# Altium PCB CANTRICK.PcbDoc (part 1 of 2)
Units mm, origin at the board's own origin, x right, y up, seen from the top; angles counter-clockwise.
Board outline 87.25 x 92.48 mm, 2 copper layers (Top Layer, Bottom Layer); 104 components, 77 nets, 373 pads, 152 vias.
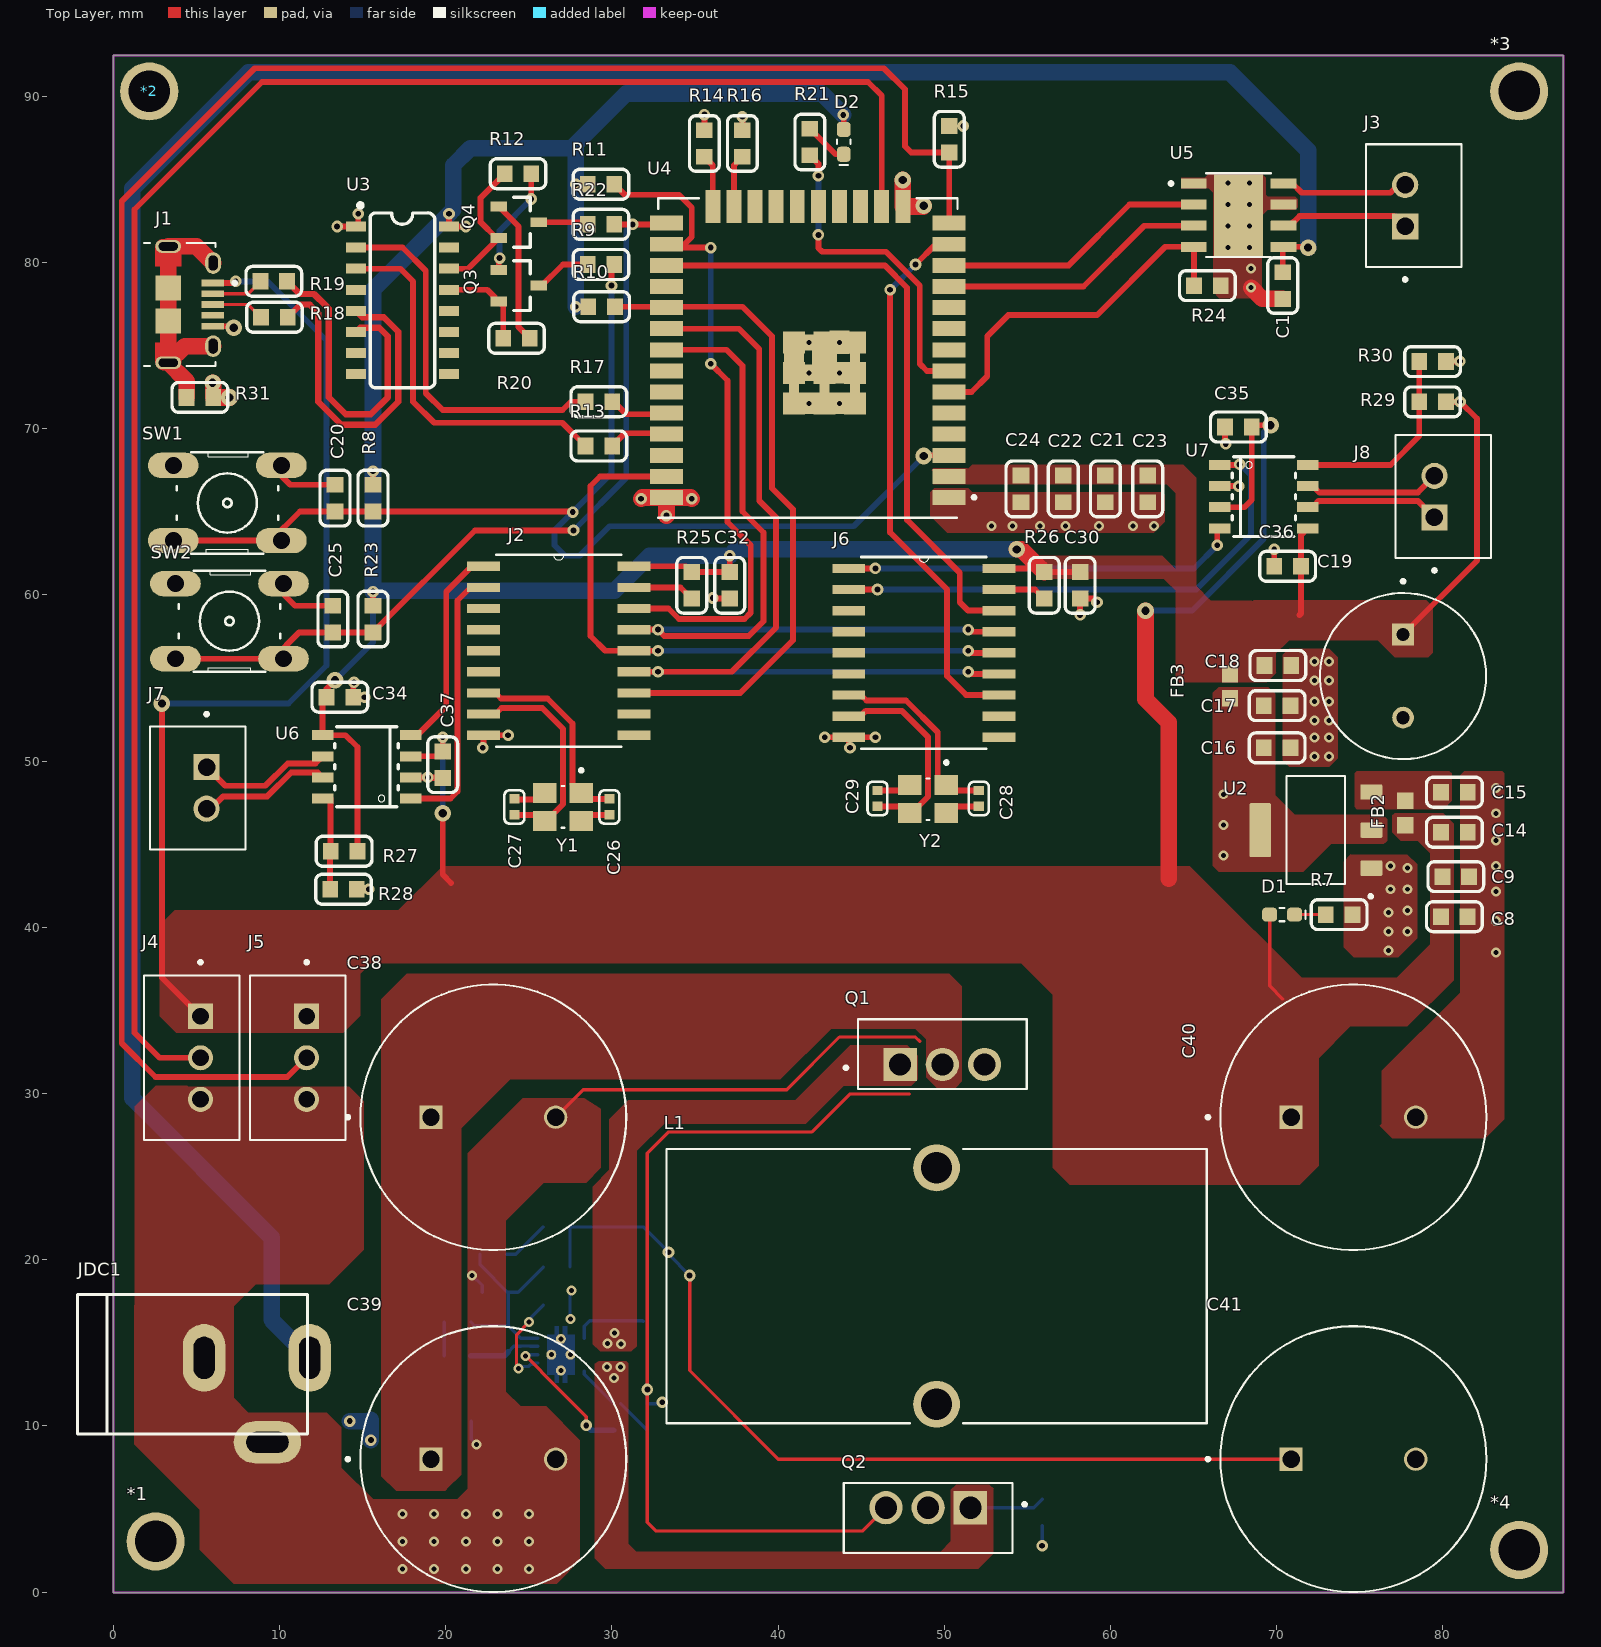
[diagram p0: Top Layer view]
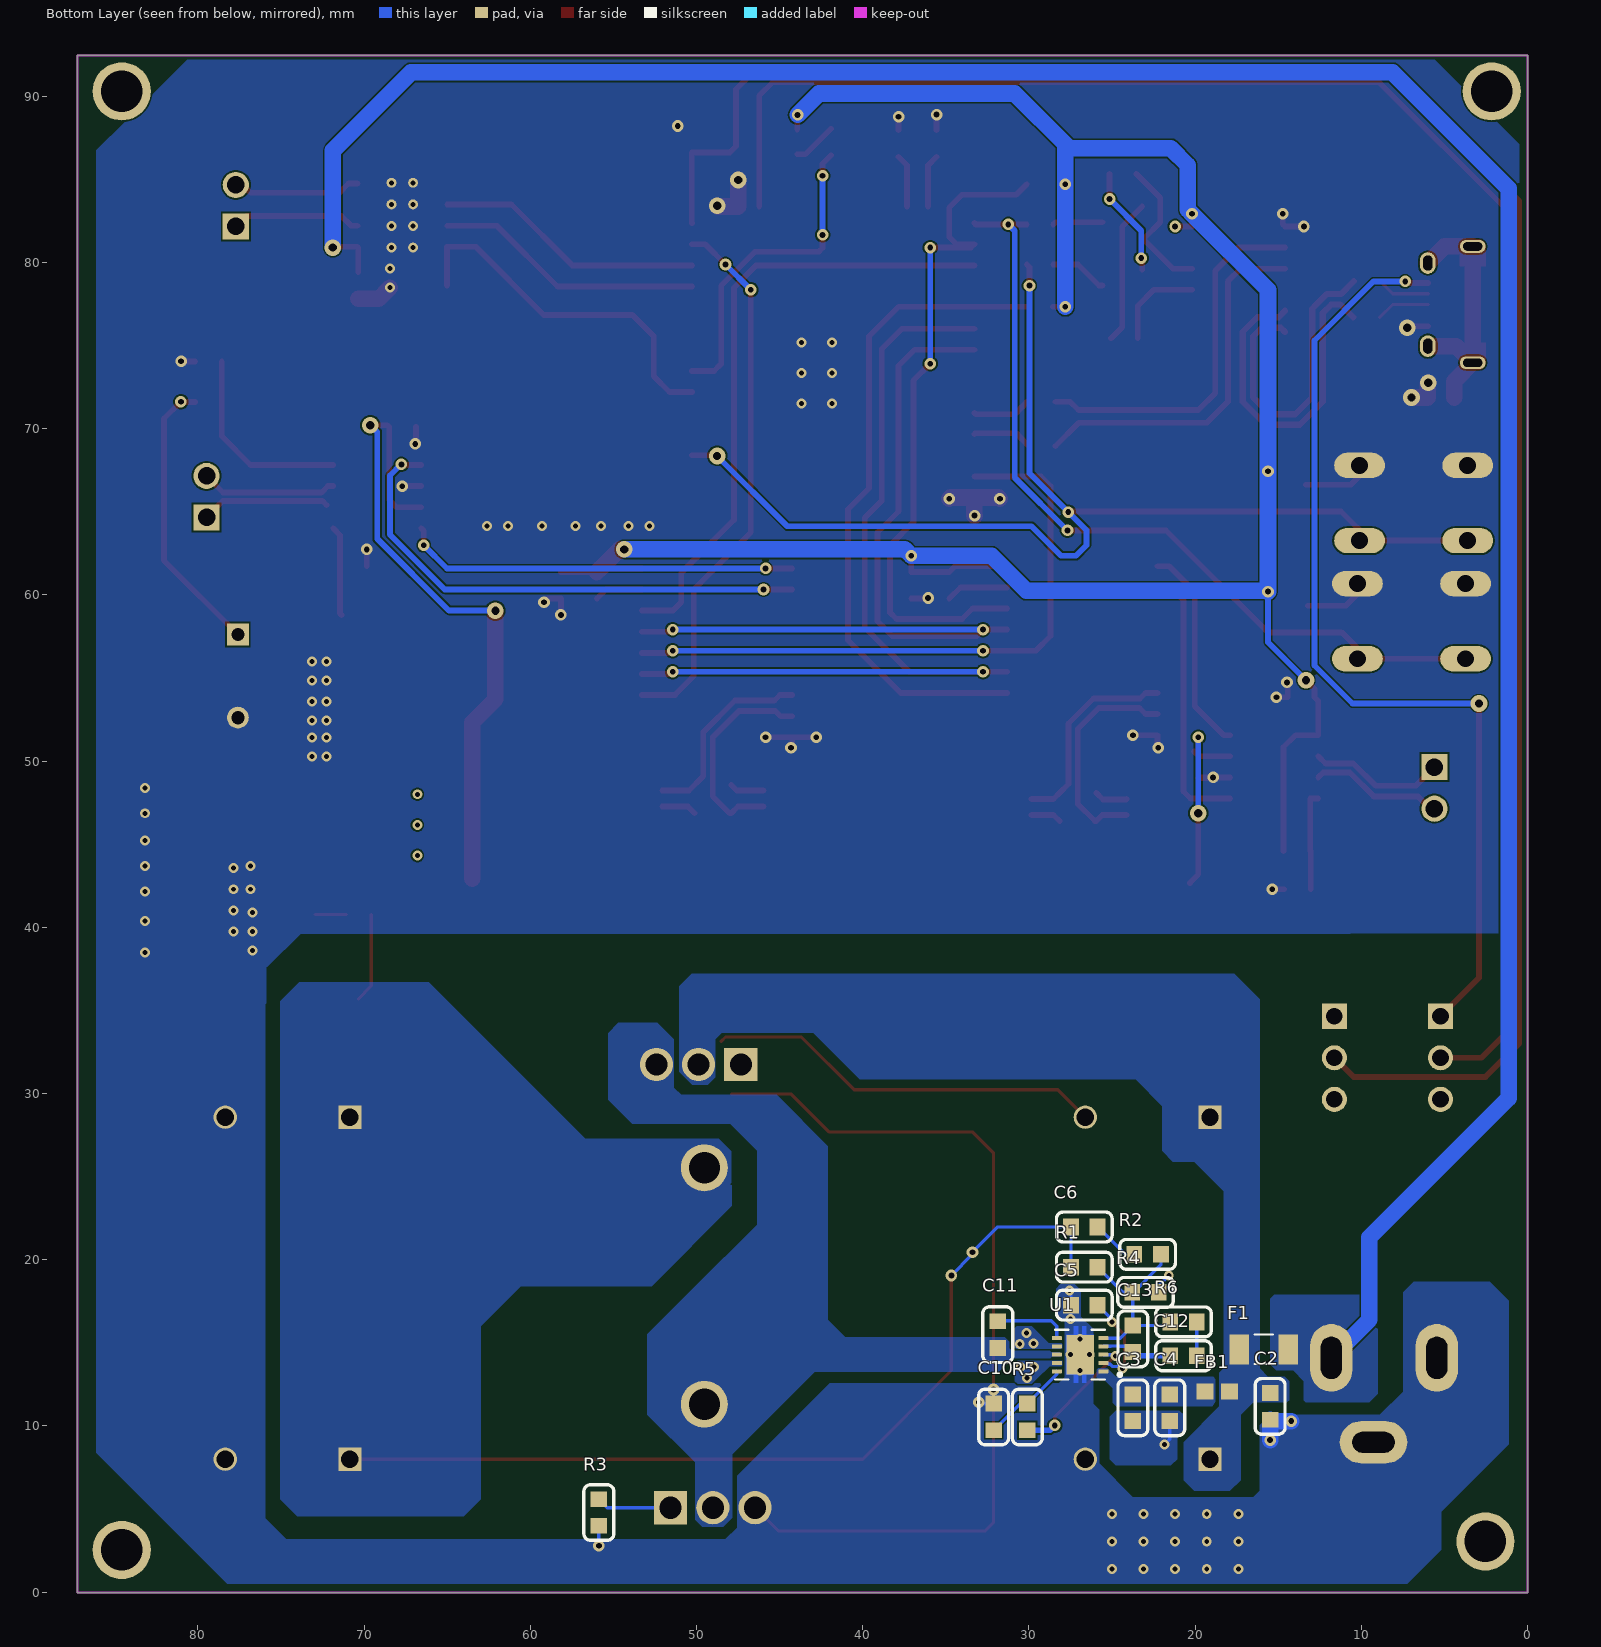
[diagram p1: Bottom Layer view, seen from below]
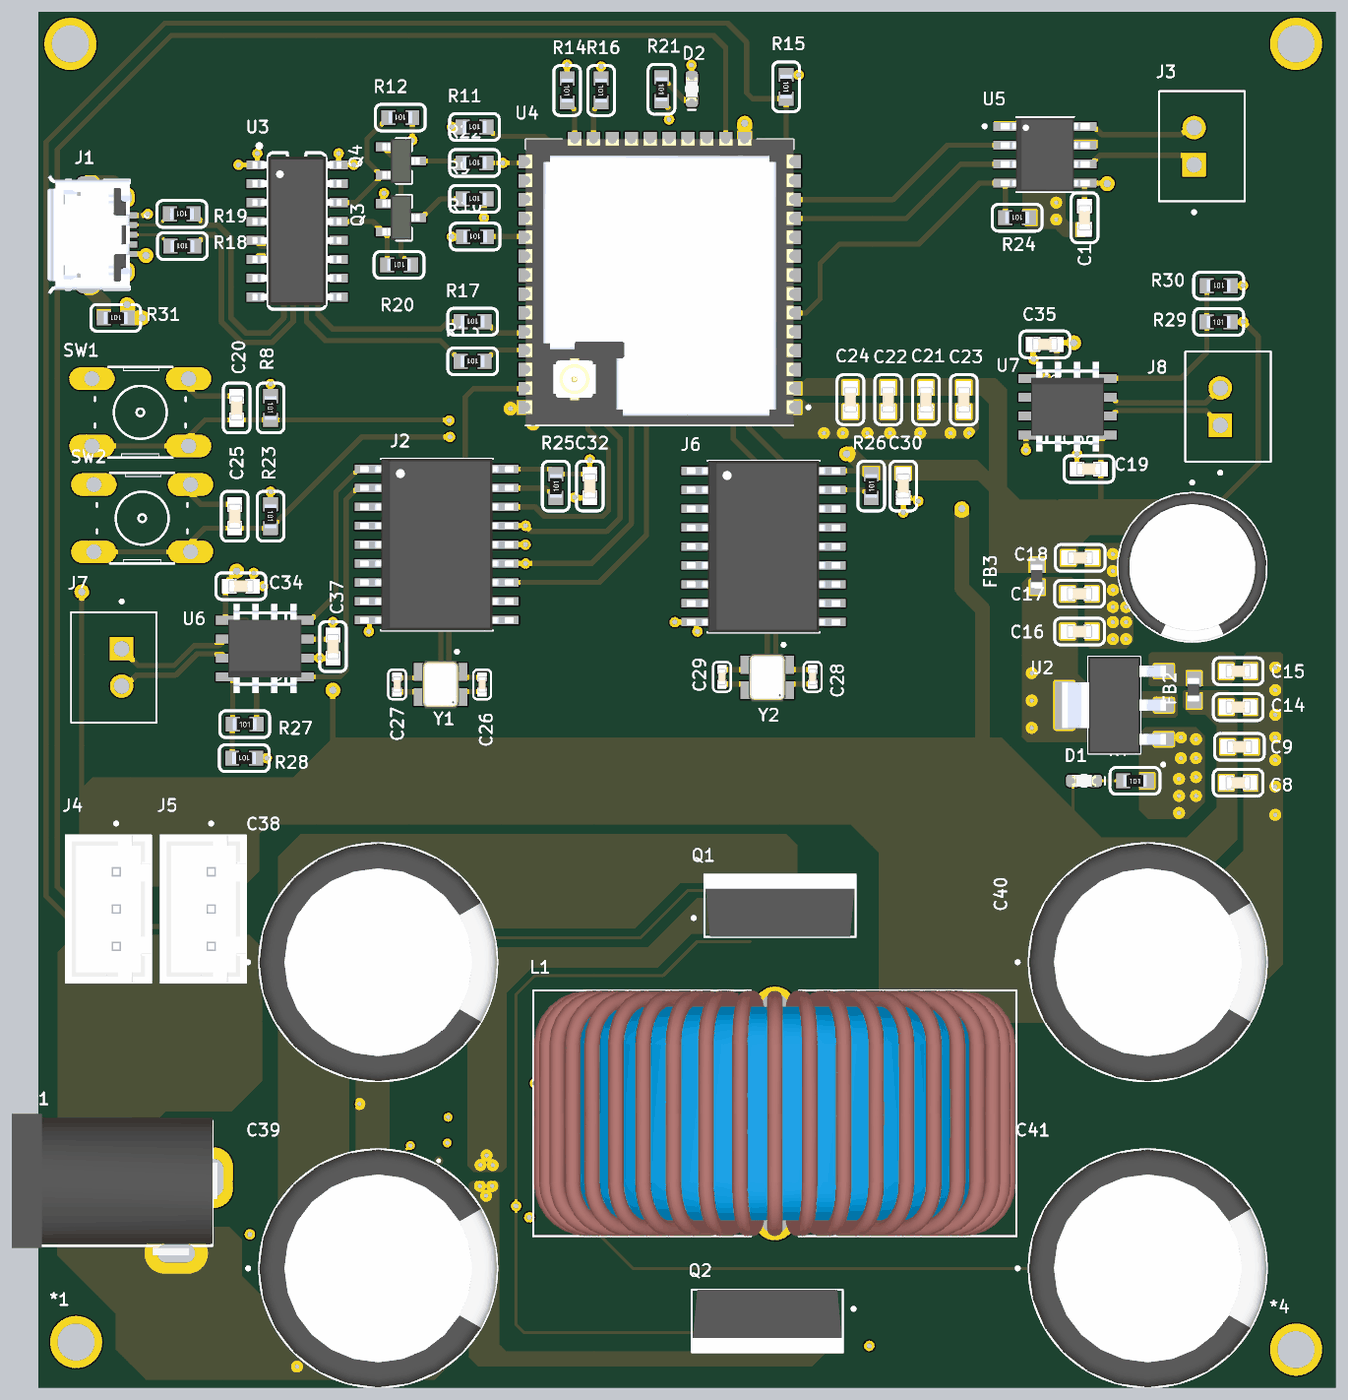
[diagram p2: 3D render of the assembled board from above, using the file's embedded part models]
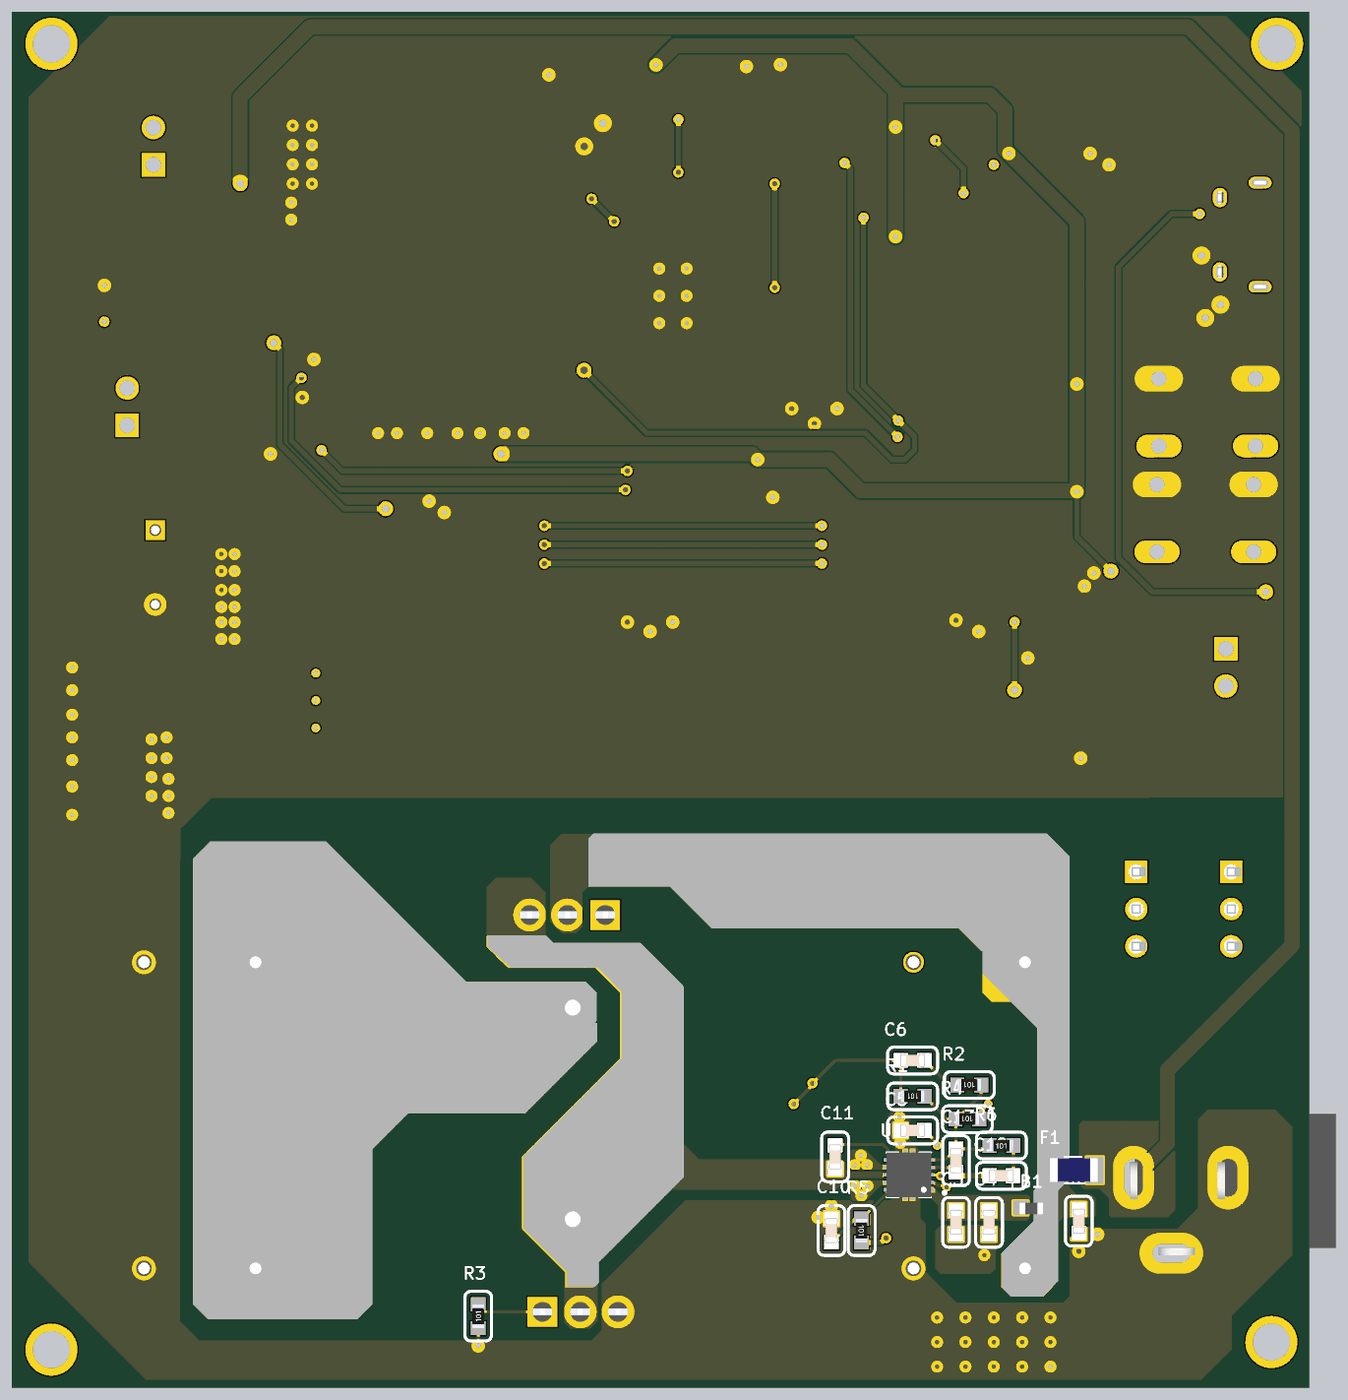
[diagram p3: 3D render of the assembled board from below, using the file's embedded part models]

## Layer stack, top to bottom
Top Solder: solder mask 0.0102, Solder Resist, Dk 3.5
Top Layer: signal copper 0.0356
Dielectric 1: dielectric 0.32, FR-4, Dk 4.8
Bottom Layer: signal copper 0.0356
Bottom Solder: solder mask 0.0102, Solder Resist, Dk 3.5

## Board outline
0,-0.023 0,92.456 87.249,92.456 87.249,-0.023

## Design rules (kind name [scope] priority, off if disabled: settings)
Clearance [All] p1: gap=0.1 ignorepadtopadclearanceinfootprint=FALSE
DiffPairsRouting [All] p1: maxlimit=0.254 minlimit=0.254 mostfreqgap=0.254 toplayer_minwidth=0.381 toplayer_maxwidth=0.381 toplayer_prefwidth=0.381 bottomlayer_minwidth=0.381 bottomlayer_maxwidth=0.381 bottomlayer_prefwidth=0.381 maxuncoupledlength=12.7
PolygonConnect [All] p1: connectstyle=Direct reliefconductorwidth=0.254 reliefentries=4 polygonreliefangle="90 Angle" airgapwidth=0.254
RoutingVias [All] p1: holewidth=0.35 width=0.7 viastyle="Through Hole" minholewidth=0.3 minwidth=0.6 maxholewidth=0.5 maxwidth=1
SolderMaskExpansion [All] p1: expansion=0.102 istentingtop=FALSE
Width [All] p1: maxlimit=1 minlimit=0.2 preferedwidth=0.35
29 further rules are at their usual default settings.

## Classes and differential pairs
component class "U_CANTRICK POWER": C2 C3 C4 C5 C6 C8 C9 C10 C11 C12 C13 C14 C15 C16 C17 C18 C19 C38 C39 C40 C41 D1 F1 FB1 FB2 FB3 JDC1 L1 Q1 Q2 R1 R2 R3 R4 R5 R6 R7 U1 U2
component class "U_CANTRICK PERIPHERAL": *1 *2 *3 *4 C1 C26 C27 C28 C29 C30 C32 C34 C35 C36 C37 J2 J3 J4 J5 J6 J7 J8 R24 R25 R26 R27 R28 R29 R30 U5 U6 U7 Y1 Y2
component class "U_CANTRICK MCU": C20 C21 C22 C23 C24 C25 D2 J1 Q3 Q4 R8 R9 R10 R11 R12 R13 R14 R15 R16 R17 R18 R19 R20 R21 R22 R23 R31 SW1 SW2 U3 U4
differential pair D: +D_P -D_N

## Components (designator, comment, footprint, x,y, rotation, side; value= is the part's Value field where it differs from the comment)
*1 "Hole M3" M3 2.54,3.048 r0 top
*2 "Hole M3" M3 2.159,90.297 r0 top
*3 "Hole M3" M3 84.582,90.297 r0 top
*4 "Hole M3" M3 84.582,2.54 r0 top
C1 "10uF" CAP-CER0603-0.8H 70.358,78.613 r270 top
C2 "10uF" CAP-CER0603-0.8H 15.494,11.176 r90 bottom
C3 "10uF" CAP-CER0603-0.8H 23.749,11.093 r90 bottom
C4 "10uF" CAP-CER0603-0.8H 21.531,11.093 r90 bottom
C5 "3.3nF" CAP-CER0603-0.8H 26.67,17.272 r180 bottom
C6 "820pF" CAP-CER0603-0.8H 26.67,21.971 r0 bottom
C8 "10uF" CAP-CER0603-0.8H 80.683,40.64 r180 top
C9 "10uF" CAP-CER0603-0.8H 80.772,43.053 r180 top
C10 "2.2uF" CAP-CER0603-0.8H 32.131,10.541 r270 bottom
C11 "100nF" CAP-CER0603-0.8H 31.877,15.494 r90 bottom
C12 "2.7nF" CAP-CER0603-0.8H 20.701,14.224 r0 bottom
C13 "100pF" CAP-CER0603-0.8H 23.749,15.24 r270 bottom
C14 "10 µF" "CAP 0603" 80.772,45.72 r180 top
C15 "10 µF" "CAP 0603" 80.772,48.133 r180 top
C16 "100nF" "CAP 0603" 70.104,50.8 r180 top
C17 "10 µF" "CAP 0603" 70.104,53.34 r180 top
C18 "10 µF" "CAP 0603" 70.151,55.753 r180 top
C19 "ECA1CHG331" 330UF-5mm 77.597,55.118 r270 top
C20 "100nF" "CAP 0603" 13.335,65.909 r270 top
C21 "100nF" "CAP 0603" 59.69,66.294 r90 top
C22 "10 µF" "CAP 0603" 57.15,66.294 r90 top
C23 "10 µF" "CAP 0603" 62.23,66.294 r90 top
C24 "100nF" "CAP 0603" 54.61,66.294 r90 top
C25 "100nF" "CAP 0603" 13.208,58.632 r270 top
C26 "8pF" CAP-CER0402-0.5H 29.845,47.244 r270 top
C27 "8pF" CAP-CER0402-0.5H 24.13,47.244 r90 top
C28 "8pF" CAP-CER0402-0.5H 52.07,47.752 r270 top
C29 "8pF" CAP-CER0402-0.5H 45.974,47.752 r90 top
C30 "10uF" CAP-CER0603-0.8H 58.166,60.579 r90 top
C32 "10uF" CAP-CER0603-0.8H 37.084,60.579 r90 top
C34 "10uF" CAP-CER0603-0.8H 13.627,53.848 r180 top
C35 "10uF" CAP-CER0603-0.8H 67.691,70.104 r0 top
C36 "10uF" CAP-CER0603-0.8H 70.65,61.722 r0 top
C37 "10uF" CAP-CER0603-0.8H 19.812,49.784 r90 top
C38 "EEUFC1V222" CAPPRD750W80D1600H3150 22.86,28.575 r0 top
C39 "EEUFC1V222" CAPPRD750W80D1600H3150 22.86,8.001 r0 top
C40 "EEUFC1V222" CAPPRD750W80D1600H3150 74.609,28.575 r0 top
C41 "EEUFC1V222" CAPPRD750W80D1600H3150 74.609,8.001 r0 top
D1 "Orange" LED 70.193,40.767 r180 top
D2 "Orange" LED 43.942,87.388 r90 top
F1 "C1F5" "FUSE C1F5" 15.875,14.605 r0 bottom
FB1 "100MHz 2A 50mOhm" "FB 0603" 18.669,12.065 r0 bottom
FB2 "330 Ohms @ 100 MHz" FB_0603 77.724,46.863 r90 top
FB3 "330 Ohms @ 100 MHz" FB_0603 67.181,54.498 r90 top
J1 "MICRO B" "MICRO USB B" 3.302,77.597 r270 top
J2 "MCP2515T-E/SO" SOIC127P1030X265-18N 26.797,56.642 r0 top
J3 "B2B-XH-A" JST_B2B-XH-A 78.249,83.419 r270 top
J4 "B3B-XH-A" JST_B3B-XH-A 4.717,32.15 r90 top
J5 "B3B-XH-A" JST_B3B-XH-A 11.102,32.15 r90 top
J6 "MCP2515T-E/SO" SOIC127P1030X265-18N 48.768,56.515 r0 top
J7 "B2B-XH-A" JST_B2B-XH-A 5.08,48.387 r90 top
J8 "B2B-XH-A" JST_B2B-XH-A 80.01,65.913 r270 top
JDC1 "Jac DC" DC0 8.636,11.557 r0 top
L1 "HCTI-10-20.0" IND_HCTI-10-20.0 49.53,18.415 r90 top
Q1 "IRLB8721PBF" TO254P1067X483X2057-3 49.879,31.75 r0 top
Q2 "IRLB8721PBF" TO254P1067X483X2057-3 49.022,5.08 r180 top
Q3 "NMOS" SOT23-3 24.384,78.613 r0 top
Q4 "NMOS" SOT23-3 24.384,82.423 r0 top
R1 "10K" RES-CHP0603-0.45H-101 26.67,19.558 r0 bottom
R2 "360R" RES-CHP0603-0.45H-101 22.86,20.32 r0 bottom
R3 "10K" RES-CHP0603-0.45H-101 55.88,4.788 r90 bottom
R4 "1.37K" RES-CHP0603-0.45H-101 22.987,18.034 r0 bottom
R5 "100K" RES-CHP0603-0.45H-101 30.099,10.541 r270 bottom
R6 "3.16k" RES-CHP0603-0.45H-101 20.701,16.256 r180 bottom
R7 "1K" "Res 0603" 73.749,40.767 r0 top
R8 "10K" "Res 0603" 15.621,65.824 r270 top
R9 "0R" "Res 0603" 29.337,79.883 r180 top
R10 "10K" "Res 0603" 29.375,77.343 r180 top
R11 "10K" "Res 0603" 29.337,84.709 r180 top
R12 "10K" "Res 0603" 24.346,85.344 r180 top
R13 "22R" "Res 0603" 29.21,68.961 r180 top
R14 "10K" "Res 0603" 35.56,87.16 r270 top
R15 "10K" "Res 0603" 50.292,87.414 r270 top
R16 "10K" "Res 0603" 37.846,87.16 r270 top
R17 "22R" "Res 0603" 29.21,71.628 r180 top
R18 "22R" "Res 0603" 9.69,76.708 r180 top
R19 "22R" "Res 0603" 9.652,78.867 r180 top
R20 "10K" "Res 0603" 24.257,75.438 r180 top
R21 "1K" "Res 0603" 41.91,87.249 r270 top
R22 "0R" "Res 0603" 29.337,82.296 r180 top
R23 "10K" "Res 0603" 15.621,58.547 r270 top
R24 "10K" "Res 0603" 65.824,78.613 r180 top
R25 "10K" "Res 0603" 34.798,60.579 r90 top
R26 "10K" "Res 0603" 56.007,60.579 r90 top
R27 "10K" "Res 0603" 13.881,44.577 r0 top
R28 "10K" "Res 0603" 13.843,42.291 r180 top
R29 "10K" "Res 0603" 79.372,71.615 r0 top
R30 "10K" "Res 0603" 79.375,74.041 r180 top
R31 "22R" "Res 0603" 5.207,71.882 r180 top
SW1 "SW2" SWITCH 6.858,65.532 r180 top
SW2 "SW2" SWITCH 6.985,58.42 r180 top
U1 "TPS40305DRCT" VREG_V62/16624-01YE 26.924,14.285 r0 bottom
U2 "AMS1117" AMS1117 72.347,45.851 r90 top
U3 "CH340C" CH340C 17.272,77.851 r270 top
U4 "ESP32-WROOM-32UE-N8" ? 42.291,70.866 r180 top
U5 "DRV8871DDAR" VREG_LM5017MR/NOPB 67.706,82.849 r0 top
U6 "TJA1050" SOT96-1 15.24,49.657 r90 top
U7 "TJA1050" SOT96-1 69.215,65.913 r270 top
Y1 "C3E-8Mhz" XTAL_C3E-8.000-8-1015-R 27.051,47.244 r270 top
Y2 "C3E-8Mhz" XTAL_C3E-8.000-8-1015-R 49.019,47.715 r270 top

## Footprints (in the part's own frame and the unit in brackets; to place one, negate y for a bottom-side part, rotate by r counter-clockwise, add the part's x,y. Pads: shape width x height; smd on the part's side, far side on the other; paste and mask are expansions set on the pad)
330UF-5mm [mm]
  rect 1.308x1.308 / inner round 1.308 / far side rect 1.308x1.308 hole 0.8: 1(-2.5,0)
  round 1.308 hole 0.8: 2(2.5,0)
  silkscreen extent -5.8,-5 5,5, body extent -5,-5 5,5, height 20
AMS1117 [mm]
  rrect15% 0.93x1.31 smd: 1(-2.29,-3.345) 2(0,-3.345) 3(2.29,-3.345)
  rrect15% 3.24x1.31 smd: 4(0,3.345)
  silkscreen extent -4.09,-3.4 3.25,1.75, body extent -3.25,-3.5 3.25,3.5, height 1.8
"CAP 0603" [mm]
  rect 0.95x1 smd: 1(-0.715,0) 2(0.885,0)
  silkscreen extent -1.59,-0.9 1.76,0.9, body extent -1.19,-0.5 1.36,0.5, height 0.82
CAP-CER0402-0.5H [mm]
  rect 0.57x0.62 smd: 1(-0.48,0) 2(0.48,0)
  silkscreen extent -1,-0.6 1,0.6, body extent -0.8,-0.33 0.8,0.32, height 0.54
CAP-CER0603-0.8H [mm]
  rect 0.95x1 smd: 1(-0.8,0) 2(0.8,0)
  silkscreen extent -1.68,-0.9 1.68,0.9, body extent -1.28,-0.5 1.28,0.5, height 0.84
CAPPRD750W80D1600H3150 [mm]
  round 1.4 hole 1.05: N(3.75,0)
  rect 1.4x1.4 hole 1.05: P(-3.75,0)
  silkscreen extent -8.85,-8 8,8, body extent -8,-8 8,8, height 31.5
CH340C [mm]
  rect 0.6x1.2 smd: 1(-4.318,-2.673) 2(-3.048,-2.673) 3(-1.778,-2.673) 4(-0.508,-2.673) 5(0.762,-2.673) 6(2.032,-2.673) 7(3.302,-2.673) 8(4.572,-2.673) 9(4.572,2.927) 10(3.302,2.927) 11(2.032,2.927) 12(0.762,2.927) 13(-0.508,2.927) 14(-1.778,2.927) 15(-3.048,2.927) 16(-4.318,2.927)
  silkscreen extent -5.71,-2.54 5.39,2.07, body extent -4.87,-2.87 5.13,3.13, height 1.8
DC0 [mil]
  oval 100x160 hole 50 slot 100 at 90 deg: 1(125,100) 2(-125,100)
  oval 160x100 hole 50 slot 100 at 0 deg: 3(25,-100)
  silkscreen extent -425,-80 120,250, body extent -410,-105 134,269, height 434
"FB 0603" [mm]
  rect 1x0.97 smd: 1(-0.733,-0.006) 2(0.737,-0.006)
  body extent -0.79,-0.36 0.81,0.44, height 0.75
FB_0603 [mm]
  rect 1x0.97 smd: 1(-0.723,-0.002) 2(0.747,-0.002)
  body extent -0.78,-0.36 0.82,0.44, height 0.75
"FUSE C1F5" [mm]
  rect 1.17x1.8 smd: 1(-1.47,0) 2(1.47,0)
  silkscreen extent -0.56,-0.89 0.56,0.89, body extent -1.65,-0.8 1.55,0.78, height 0.8
IND_HCTI-10-20.0 [mm]
  round 2.82 hole 1.88: 1(-7.112,0) 2(7.112,0)
  silkscreen extent -8.26,-16.26 8.26,16.26, body extent -8.26,-16.21 8.26,16.21, height 34.1
JST_B2B-XH-A [mm]
  rect 1.575x1.575 / inner round 1.575 / far side rect 1.575x1.575 hole 1.05: 1(1.25,-0.525)
  round 1.575 hole 1.05: 2(-1.25,-0.525)
  silkscreen extent -3.7,-2.88 4.54,2.88
JST_B3B-XH-A [mm]
  rect 1.508x1.508 / inner round 1.508 / far side rect 1.508x1.508 hole 1: 1(2.5,-0.525)
  round 1.508 hole 1: 2(0,-0.525) 3(-2.5,-0.525)
  silkscreen extent -4.95,-2.88 5.85,2.88, body extent -4.95,-2.88 4.95,2.88, height 7
LED [mm]
  rrect53% 0.91x0.83 smd: 1(0.623,0) 2(-0.877,0)
  silkscreen extent -1.52,-0.4 0.01,0.4, body extent -0.93,-0.4 0.67,0.4, height 0.7
M3 [mm]
  round 3.5 hole 2.5: 1(0,0)
"MICRO USB B" [mm]
  rect 0.4x1.35 smd: 1(-1.173,2.675) 2(-0.523,2.675) 3(0.127,2.675) 4(0.777,2.675) 5(1.427,2.675)
  oval 0.775x1.55 hole 0.5 slot 1.15 at 90 deg mask+0: SH1(-3.373,0) SH4(3.627,0)
  rect 1.5x1.55 smd: SH2(1.127,0) SH3(-0.873,0)
  oval 1.3x0.95 hole 0.55 slot 0.9 at 0 deg: SH5(-2.373,2.7) SH6(2.627,2.7)
  Top Layer region: -2.173,-0.775 -3.318,-0.775 -3.344,-0.774 -3.37,-0.772 -3.396,-0.769 -3.422,-0.764 -3.447,-0.758 -3.473,-0.751 -3.497,-0.742 -3.521,-0.732 -3.545,-0.721 -3.568,-0.708 -3.59,-0.694 -3.612,-0.68 -3.633,-0.664 -3.653,-0.647 -3.672,-0.629 -3.69,-0.61 -3.707,-0.59 -3.723,-0.569 -3.737,-0.547 -3.751,-0.525 -3.764,-0.502 -3.775,-0.478 -3.785,-0.454 -3.794,-0.43 -3.801,-0.404 -3.807,-0.379 -3.812,-0.353 -3.815,-0.327 -3.817,-0.301 -3.818,-0.275 -3.818,0.275 -3.817,0.301 -3.815,0.327 -3.812,0.353 -3.807,0.379 -3.801,0.404 -3.794,0.43 -3.785,0.454 -3.775,0.478 -3.764,0.502 -3.751,0.525 -3.737,0.547 -3.723,0.569 -3.707,0.59 -3.69,0.61 -3.672,0.629 -3.653,0.647 -3.633,0.664 -3.612,0.68 -3.59,0.694 -3.568,0.708 -3.545,0.721 -3.521,0.732 -3.497,0.742 -3.473,0.751 -3.447,0.758 -3.422,0.764 -3.396,0.769 -3.37,0.772 -3.344,0.774 -3.318,0.775 -2.173,0.775
  Top Layer region: 3.598,0.774 3.624,0.772 3.65,0.769 3.676,0.764 3.701,0.758 3.727,0.751 3.751,0.742 3.775,0.732 3.799,0.721 3.822,0.708 3.844,0.694 3.866,0.68 3.887,0.664 3.907,0.647 3.926,0.629 3.944,0.61 3.961,0.59 3.977,0.569 3.991,0.547 4.005,0.525 4.018,0.502 4.029,0.478 4.039,0.454 4.048,0.43 4.055,0.404 4.061,0.379 4.066,0.353 4.069,0.327 4.071,0.301 4.072,0.275 4.072,-0.275 4.071,-0.301 4.069,-0.327 4.066,-0.353 4.061,-0.379 4.055,-0.404 4.048,-0.43 4.039,-0.454 4.029,-0.478 4.018,-0.502 4.005,-0.525 3.991,-0.547 3.977,-0.569 3.961,-0.59 3.944,-0.61 3.926,-0.629 3.907,-0.647 3.887,-0.664 3.866,-0.68 3.844,-0.694 3.822,-0.708 3.799,-0.721 3.775,-0.732 3.751,-0.742 3.727,-0.751 3.701,-0.758 3.676,-0.764 3.65,-0.769 3.624,-0.772 3.598,-0.774 3.572,-0.775 2.427,-0.775 2.427,0.775 3.572,0.775
  silkscreen extent -3.57,-1.45 3.83,4.1, body extent -3.9,-2.68 4.15,2.85, height 2.67
"Res 0603" [mm]
  rect 0.95x1 smd: 1(-0.8,0) 2(0.8,0)
  silkscreen extent -1.68,-0.9 1.68,0.9, body extent -0.8,-0.4 0.8,0.4, height 0.48
RES-CHP0603-0.45H-101 [mm]
  rect 0.95x1 smd: 1(-0.8,0) 2(0.8,0)
  silkscreen extent -1.68,-0.9 1.68,0.9, body extent -0.8,-0.4 0.8,0.4, height 0.48
SOIC127P1030X265-18N [mil]
  rect 78x22 smd: 1(-178,200) 2(-178,150) 3(-178,100) 4(-178,50) 5(-178,0) 6(-178,-50) 7(-178,-100) 8(-178,-150) 9(-178,-200) 10(178,-200) 11(178,-150) 12(178,-100) 13(178,-50) 14(178,0) 15(178,50) 16(178,100) 17(178,150) 18(178,200)
  silkscreen extent -148,-227 148,227, body extent -203,-227 203,227, height 104
SOT23-3 [mm]
  rect 1x0.6 smd: 1(-1.2,0.95) 2(-1.2,-0.95) 3(1.2,0)
  silkscreen extent -0.3,-1.5 0.7,1.5, body extent -1.24,-1.49 1.26,1.51, height 1.1
SOT96-1 [mm]
  rect 0.6x1.3 smd: 1(-1.905,-2.65) 2(-0.635,-2.65) 3(0.635,-2.65) 4(1.905,-2.65) 5(1.905,2.65) 6(0.635,2.65) 7(-0.635,2.65) 8(-1.905,2.65)
  silkscreen extent -2.4,-1.9 2.4,1.91, body extent -3,-2.45 3,2.45, height 1.75
SWITCH [mil]
  oval 120x60 hole 40: 1(-128,89) 2(128,89) 3(-128,-89) 4(128,-89)
  silkscreen extent -120,-120 120,120, body extent -161,-122 151,122, height 374
TO254P1067X483X2057-3 [mm]
  rect 2x2 / inner round 2 / far side rect 2x2 hole 1.33: 1(-2.54,0)
  round 2 hole 1.33: 2(0,0) 3(2.54,0)
  silkscreen extent -5.9,-1.48 5.08,2.72, body extent -5.08,-1.47 5.08,2.72, height 20.57
VREG_LM5017MR/NOPB [mm]
  rrect5% 1.55x0.6 smd mask+0: 1(-2.7,1.905) 2(-2.7,0.635) 3(-2.7,-0.635) 4(-2.7,-1.905) 5(2.7,-1.905) 6(2.7,-0.635) 7(2.7,0.635) 8(2.7,1.905)
  rect 2.95x4.9 smd paste-3 mask+0: 9(0,0)
  round 0.6 hole 0.3: 10(-0.65,1.95) 11(0.65,1.95) 12(-0.65,0.65) 13(0.65,0.65) 14(-0.65,-0.65) 15(0.65,-0.65) 16(-0.65,-1.95) 17(0.65,-1.95)
  silkscreen extent -4.17,-2.52 1.95,2.52, body extent -3,-2.45 3,2.45, height 1.7
VREG_V62/16624-01YE [mm]
  rrect25% 0.6x0.24 smd paste+0 mask+0: 1(-1.4,1) 2(-1.4,0.5) 3(-1.4,0) 4(-1.4,-0.5) 5(-1.4,-1) 6(1.4,-1) 7(1.4,-0.5) 8(1.4,0) 9(1.4,0.5) 10(1.4,1)
  rrect5% 1.65x2.4 smd paste-2 mask+0: 11(0,0)
  round 0.6 hole 0.3 mask+0: 12(0,-0.95) 13(-0.575,0) 14(0.575,0) 15(0,0.95)
  Top Layer region: 0.375,1.2 0.825,1.2 0.825,-1.2 0.375,-1.2 0.375,-1.7 0.125,-1.7 0.125,-1.2 -0.125,-1.2 -0.125,-1.7 -0.375,-1.7 -0.375,-1.2 -0.825,-1.2 -0.825,1.2 -0.375,1.2 -0.375,1.7 -0.125,1.7 -0.125,1.2 0.125,1.2 0.125,1.7 0.375,1.7
  silkscreen extent -2.49,-1.5 1.5,1.5, body extent -1.5,-1.5 1.5,1.5, height 1
XTAL_C3E-8.000-8-1015-R [mm]
  rect 1.2x1.4 smd: 1(-0.85,1.1) 2(-0.85,-1.1) 3(0.85,-1.1) 4(0.85,1.1)
  silkscreen extent -2.3,-0.08 1.25,1.2, body extent -1.25,-1.6 1.25,1.6, height 0.75
? [mm]
  rect 2x0.9 smd: 1(-7.992,5.006) 2(-7.992,3.736) 3(-7.992,2.466) 4(-7.992,1.196) 5(-7.992,-0.074) 6(-7.992,-1.344) 7(-7.992,-2.614) 8(-7.992,-3.884) 9(-7.992,-5.154) 10(-7.992,-6.424) 11(-7.992,-7.694) 12(-7.992,-8.964) 13(-7.992,-10.234) 14(-7.992,-11.504) 25(9.008,-11.504) 26(9.008,-10.234) 27(9.008,-8.964) 28(9.008,-7.694) 29(9.008,-6.424) 30(9.008,-5.154) 31(9.008,-3.884) 32(9.008,-2.614) 33(9.008,-1.344) 34(9.008,-0.074) 35(9.008,1.196) 36(9.008,2.466) 37(9.008,3.736) 38(9.008,5.006)
  rect 0.9x2 smd: 15(-5.207,-12.504) 16(-3.937,-12.504) 17(-2.667,-12.504) 18(-1.397,-12.504) 19(-0.127,-12.504) 20(1.143,-12.504) 21(2.413,-12.504) 22(3.683,-12.504) 23(4.953,-12.504) 24(6.223,-12.504)
  rect 1.33x1.33 smd: 39_1(-2.327,-0.659) 39_2(-0.492,-0.659) 39_3(1.343,-0.659) 39_4(-2.327,-2.494) 39_5(-0.492,-2.494) 39_6(1.343,-2.494) 39_7(-2.327,-4.329) 39_8(-0.492,-4.329) 39_9(1.343,-4.329)
  rect 0.6x1.3 smd: 39_10(-1.409,-0.659) 39_11(0.426,-0.659) 39_15(-1.409,-2.494)
  rect 0.6x1.2 smd: 39_12(-2.327,-1.576)
  rect 0.6x1 smd: 39_13(-0.492,-1.576) 39_14(1.343,-1.576) 39_16(0.426,-2.494) 39_17(-2.327,-3.411)
  rect 1.5x1.55 smd: 39_18(-0.492,-3.411)
  rect 1.2x1.4 smd: 39_19(1.343,-3.411) 39_20(-1.409,-4.329)
  rect 1x0.97 smd: 39_21(0.426,-4.329)
  silkscreen extent -9.59,-13 9.52,6.22, body extent -8.49,-13.03 9.51,6.17, height 3.35

## Part data
C1 C2 C3 C4 C5 C6 C8 C9 C10 C11 C12 C13 C30 C32 C34 C35 C36 C37: library part "CAPCER0001 100nF 10% 50V X7R 0603 SMD", "CAP CER 100nF 10% 50V X7R 0603 SMD", CERTIFICATION=NA, CLASS=B, ComponentLink1Description=Datasheet, ComponentLink1URL=https://datasheet.lcsc.com/lcsc/1811021431_Samsung-Electro-Mechanics-CL10B104KB8NNNC_C1591.pdf, LINE=SMT, MOUNT=SMD, TMG CODE=None, TMG PN=CAPCER0001, TYPE=EP, UNIT=PCS
C14 C15 C17 C18 C22 C23: library part GMC10X7R106K10NT, "CAP0603 X7R 10UF 10% 10V", Device Package="0603 (1608 Metric)", Manufacturer="Cal-Chip Electronics, Inc.", Operating Temperature="-55°C ~ 125°C", Supplier Part Number 1=4713-GMC10X7R106K10NTCT-ND, Temperature Coefficient=X7R, Tolerance=±10%, Voltage - Rated=10V, Applications="General Purpose", Capacitance="10 µF", ComponentLink1Description=Datasheet, ComponentLink1URL=https://88ce57.p3cdn1.secureserver.net/wp-content/uploads/2023/01/gmc_series-2.pdf, ComponentLink2Description="DigiKey Link", ComponentLink2URL=https://www.digikey.com/en/products/detail/cal-chip-electronics-inc/GMC10X7R106K10NT/18151126, LastUpdated="2/9/2024 8:09:39 PM", Lifecycle Status=Active, Minimum Order=1, Mounting Type="Surface Mount, MLCC", Package / Case="0603 (1608 Metric)", Packaging=TapeAndReel, Part Number=GMC10X7R106K10NT, Part Status=Active, partid=49835, Price=0.26, Series=GMC, Size / Dimension="0.063\" L x 0.031\" W (1.60mm x 0.80mm)", Supplier 1=DigiKey, Thickness (Max)="0.039\" (1.00mm)"
C16 C20 C21 C24 C25: library part GMC10X7R106K10NT, "CAP0603 X7R 10UF 10% 10V", Capacitance="10 µF", Device Package="0603 (1608 Metric)", Manufacturer="Cal-Chip Electronics, Inc.", Operating Temperature="-55°C ~ 125°C", Supplier Part Number 1=4713-GMC10X7R106K10NTCT-ND, Temperature Coefficient=X7R, Tolerance=±10%, Voltage - Rated=10V, Applications="General Purpose", ComponentLink1Description=Datasheet, ComponentLink1URL=https://88ce57.p3cdn1.secureserver.net/wp-content/uploads/2023/01/gmc_series-2.pdf, ComponentLink2Description="DigiKey Link", ComponentLink2URL=https://www.digikey.com/en/products/detail/cal-chip-electronics-inc/GMC10X7R106K10NT/18151126, LastUpdated="2/9/2024 8:09:39 PM", Lifecycle Status=Active, Minimum Order=1, Mounting Type="Surface Mount, MLCC", Package / Case="0603 (1608 Metric)", Packaging=TapeAndReel, Part Number=GMC10X7R106K10NT, Part Status=Active, partid=49835, Price=0.26, Series=GMC, Size / Dimension="0.063\" L x 0.031\" W (1.60mm x 0.80mm)", Supplier 1=DigiKey, Thickness (Max)="0.039\" (1.00mm)"
C19: "Cap Aluminum 330uF 16V 20% (8 X 11.5mm) Radial Aluminum Cylindrical Can 3.5mm 260mA 1000 hr 105C Bulk", Package="RADIAL-2 Panasonic", Availability="In Stock", Check_prices=https://www.snapeda.com/parts/ECA-1CHG331/Panasonic/view-part/?ref=eda, MF=Panasonic, MP=ECA-1CHG331, Price=None, Purchase-URL=https://pricing.snapeda.com/search/part/ECA-1CHG331/?ref=eda, SnapEDA_Link=https://www.snapeda.com/parts/ECA-1CHG331/Panasonic/view-part/?ref=snap
C26 C27 C28 C29: library part "CAPCER0013 100nF 10% 50V X7R 0402 SMD", "CAP CER 100nF 10% 50V X7R 0402 SMD", CERTIFICATION=NA, CLASS=B, ComponentLink1Description=Datasheet, ComponentLink1URL=https://datasheet.lcsc.com/lcsc/1811021431_Samsung-Electro-Mechanics-CL10B104KB8NNNC_C1591.pdf, LINE=SMT, MOUNT=SMD, TMG CODE=None, TMG PN=CAPCER0013, TYPE=EP, UNIT=PCS
C38 C39 C40 C41: "2200ÂµF 35V Aluminum Electrolytic Capacitors Radial, Can 5000 Hrs @ 105Â°C", Package="RADIAL-2 Panasonic", Availability="No availability data", Check_prices=https://www.snapeda.com/parts/EEUFC1V222/Panasonic/view-part/5783312/?ref=eda, MF=Panasonic, MP=EEUFC1V222, Price=None, SnapEDA_Link=https://www.snapeda.com/parts/EEUFC1V222/Panasonic/view-part/5783312/?ref=snap
D1 D2: library part "LED ORANGE 606NM 0603", "LED SMARTLED ORANGE 606NM 0603", Current - Test=2mA, Luminous Flux @ Current - Test="25 mlm", Manufacturer="OSRAM Opto Semiconductors Inc", Manufacturer Part Number="LO L29K-H2K1-24-Z", Millicandela Rating=6.3mcd, Package / Case=LED_0603, Supplier Part Number 1=475-2740-1-ND, Voltage - Forward (Vf) Typ=1.8V, By=Hieu.Nguyen_20191030, Category=Optoelectronics, Color=Orange, ComponentLink1Description=http://catalog.osram-os.com/catalogue/catalogue.do;jsessionid=302CF83AF637AE24E40AEB0ADA267EDD?act=downloadFile&favOid=020000010003f9de000100b6, ComponentLink1URL=http://catalog.osram-os.com/catalogue/catalogue.do;jsessionid=302CF83AF637AE24E40AEB0ADA267EDD?act=downloadFile&favOid=020000010003f9de000100b6, Height=0.65mm, Lens Style/Size="Rectangle with Flat Top, 1.3mm x 0.8mm", Lens Type=Diffused, Mounting Type="Surface Mount", Packaging="Cut Tape (CT)", Pricing 1="1=0.17, 10=0.141, 100=0.1127, 250=0.0986, 500=0.09016 (USD)", RoHS="RoHS Compliant", Size / Dimension="1.70mm L x 0.80mm W", Stock 1=15900, Supplier 1=Digi-Key, Viewing Angle=160°, Wavelength - Dominant=606nm, Wavelength - Peak=610nm
F1: "Fuse Chip Fast Acting 5A 125V SMD Solder Pad 1206 3.2 X 1.58 X 0.63mm", Case Code (Imperial)=1206, Case Code (Metric)=3216, DC Cold Resistance=20mR, Manufacturer="Bel TRP", Max Operating Temperature=125°C, Min Operating Temperature=-55°C, Supplier Part Number 1=48AC8480, Voltage Rating=125V, Voltage Rating (DC)=63V, Case/Package=1206, Category=Uncategorized, ComponentLink1Description=http://www.mouser.com/ds/2/643/C1F-594910.pdf?src-supplier=Mouser, ComponentLink1URL=http://www.mouser.com/ds/2/643/C1F-594910.pdf?src-supplier=Mouser, ComponentLink2Description=http://belfuse.com/pdfs/C1F.pdf?src-supplier=Avnet, ComponentLink2URL=http://belfuse.com/pdfs/C1F.pdf?src-supplier=Avnet, ComponentLink3Description=https://belfuse.com/resources/datasheets/circuitprotection/ds-cp-c1f-series.pdf?src-supplier=Digikey, ComponentLink3URL=https://belfuse.com/resources/datasheets/circuitprotection/ds-cp-c1f-series.pdf?src-supplier=Digikey, Contact Plating=Tin, Fuse Type="Board Mount (Cartridge Style Excluded)", Manufacturer Part Number=C1F5, MOUNT="Surface Mount", Number of Pins=2, Packaging="Cut Tape", RoHS=Yes, Series=C1F, Supplier 1=Newark, Voltage Rating (AC)=125V
FB1: library part BLM18PG121SN1D, "Ferrite Beads Multi-Layer 120Ohm 25% 100MHz 2A 50mOhm DCR 0603 Paper T/R", Case Code (Imperial)=0603, Case Code (Metric)=1608, Current Rating=2A, DC Resistance (DCR)=50mR, Frequency=100MHz, Manufacturer=Murata, Max Operating Temperature=125°C, Min Operating Temperature=-55°C, Package Quantity=1, Supplier Part Number 1=81-BLM18PG121SN1D, Tolerance=25%, Case/Package=0603, Category="Ferrite Beads and Chips", ComponentLink1Description=https://datasheet.ciiva.com/5709/1740433-5709171.pdf?src-supplier=Farnell, ComponentLink1URL=https://datasheet.ciiva.com/5709/1740433-5709171.pdf?src-supplier=Farnell, ComponentLink2Description=https://datasheet.ciiva.com/19454/1845013-19454715.pdf?src-supplier=Jameco, ComponentLink2URL=https://datasheet.ciiva.com/19454/1845013-19454715.pdf?src-supplier=Jameco, ComponentLink3Description=https://datasheet.ciiva.com/11799/0900766b81275ca5-11799546.pdf?src-supplier=Rs, ComponentLink3URL=https://datasheet.ciiva.com/11799/0900766b81275ca5-11799546.pdf?src-supplier=Rs, ComponentLink4Description=https://datasheet.ciiva.com/3854/5emiapbde-1-3854039.pdf?src-supplier=Arrow+Electronics, ComponentLink4URL=https://datasheet.ciiva.com/3854/5emiapbde-1-3854039.pdf?src-supplier=Arrow+Electronics, ComponentLink5Description=https://datasheet.ciiva.com/29347/442365-da-01-en-chip-drossel-0603-120r-2000ma-1-6x0-8mm-29347911.pdf?src-supplier=Conrad, ComponentLink5URL=https://datasheet.ciiva.com/29347/442365-da-01-en-chip-drossel-0603-120r-2000ma-1-6x0-8mm-29347911.pdf?src-supplier=Conrad, ComponentLink6Description=https://datasheet.ciiva.com/8021/1740433-8021493.pdf?src-supplier=Element14, ComponentLink6URL=https://datasheet.ciiva.com/8021/1740433-8021493.pdf?src-supplier=Element14, ComponentLink7Description=https://datasheet.ciiva.com/8021/1740433-8021494.pdf?src-supplier=Element14, ComponentLink7URL=https://datasheet.ciiva.com/8021/1740433-8021494.pdf?src-supplier=Element14, ComponentLink8Description=https://datasheet.ciiva.com/14122/blm-series-eng-tds-14122905.pdf?src-supplier=Distrelec, ComponentLink8URL=https://datasheet.ciiva.com/14122/blm-series-eng-tds-14122905.pdf?src-supplier=Distrelec, ComponentLink9Description=https://datasheet.ciiva.com/6212/l0110s0100blm18p-6212502.pdf?src-supplier=Digikey, ComponentLink9URL=https://datasheet.ciiva.com/6212/l0110s0100blm18p-6212502.pdf?src-supplier=Digikey, ComponentLink10Description=https://datasheet.ciiva.com/6212/l0110s0100blm18p-6212504.pdf?src-supplier=Digikey, ComponentLink10URL=https://datasheet.ciiva.com/6212/l0110s0100blm18p-6212504.pdf?src-supplier=Digikey, ComponentLink11Description=https://datasheet.ciiva.com/3081/l0110s0100blm18p-3081632.pdf?src-supplier=Avnet, ComponentLink11URL=https://datasheet.ciiva.com/3081/l0110s0100blm18p-3081632.pdf?src-supplier=Avnet, ComponentLink12Description=https://datasheet.ciiva.com/41449/001172297-da-01-en-drossel-0603-120r-1-6x0-8mm-4000st-41449659.pdf?src-supplier=Conrad, ComponentLink12URL=https://datasheet.ciiva.com/41449/001172297-da-01-en-drossel-0603-120r-1-6x0-8mm-4000st-41449659.pdf?src-supplier=Conrad, Core Material=Ferrite, DC Current=2A, DC Resistance-Max=50mR, Depth=0.8mm, Height=0.8mm, Impedance=120R, Lead Free="Lead Free", Length=1.6mm, Manufacturer Part Number=BLM18PG121SN1D, Material=Steel,Ferrite, Max Current Rating=2A, Max DC Current=2A, Number of Circuits=1NUMBER, Number of Lines=1, Number of Pins=2, Packaging="Tape and Reel", Pricing 1="1=0.1, 10=0.059, 50=0.047, 100=0.042, 1000=0.029, 10000=0.018 (USD)", Radiation Hardening=No, Reach SVHC Compliant=No, RMS Current (Irms)=2A, RoHS=Yes, RoHS Compliant=Yes, Series=BLM18P, Series Resistance=50mR, Shielding=202Shielding, Stock 1=377848, Supplier 1=Mouser, Termination=SMD/SMT, Test Frequency=100MHz, Width=0.8mm
FB2 FB3: library part BLM18KG331SH1D, "FERRITE BEAD 330 OHM 0603 1LN", Current Rating (Max)=1.7A, DC Resistance (DCR) (Max)=80mOhm, Device Package="0603 (1608 Metric)", Manufacturer="Murata Electronics", Operating Temperature="-55°C ~ 125°C", Ratings=AEC-Q200, Supplier Part Number 1=490-13257-1-ND, ComponentLink1Description=Datasheet, ComponentLink1URL=https://www.murata.com/en-global/products/productdata/8796737273886/QNFA9101.pdf, ComponentLink2Description="DigiKey Link", ComponentLink2URL=https://www.digikey.com/en/products/detail/murata-electronics/BLM18KG331SH1D/5881246, Filter Type="Power Line", Height (Max)="0.037\" (0.95mm)", Impedance @ Frequency="330 Ohms @ 100 MHz", LastUpdated="3/11/2024 7:43:28 AM", Lifecycle Status=Active, Minimum Order=1, Mounting Type="Surface Mount", Number of Lines=1, Package / Case="0603 (1608 Metric)", Packaging=TapeAndReel, Part Number=BLM18KG331SH1D, Part Status=Active, partid=932, Price=0.02, Series="EMIFIL®, BLM18", Size / Dimension="0.063\" L x 0.032\" W (1.60mm x 0.80mm)", Supplier 1=DigiKey
J1: library part "MICRO USB B"
J2 J6: "CAN controller w/ SPI interface, 125 deg C18 SOIC .300in T/R", Package="SOIC-18 Microchip", Check_prices=https://www.snapeda.com/parts/MCP2515T-E/SO/Microchip/view-part/?ref=eda, MF=Microchip, MP=MCP2515T-E/SO, SnapEDA_Link=https://www.snapeda.com/parts/MCP2515T-E/SO/Microchip/view-part/?ref=snap
J3 J7 J8: Package=None, Availability=Unavailable, MF="{'manufacturer': u'JST Sales America Inc.'}", MP=B2B-XH-A, Price=None
J4 J5: "Connector Header Through Hole 3 position 0.098 (2.50mm)", Package=None, Check_prices=https://www.snapeda.com/parts/B3B-XH-A/JST+Sales+America+Inc./view-part/?ref=eda, MF="JST Sales", MP=B3B-XH-A, SnapEDA_Link=https://www.snapeda.com/parts/B3B-XH-A/JST+Sales+America+Inc./view-part/?ref=snap
JDC1: library part DCIN, "Jac DC input"
L1: "High Current Toroidal Inductor", Package="Radial Bel Fuse", Check_prices=https://www.snapeda.com/parts/HCTI-10-20.0/Signal+Transformer/view-part/?ref=eda, MF="Signal Transformer", MP=HCTI-10-20.0, SnapEDA_Link=https://www.snapeda.com/parts/HCTI-10-20.0/Signal+Transformer/view-part/?ref=snap
Q1 Q2: "IRLB8721PBF N-channel MOSFET Transistor, 62 A, 30 V, 3-Pin TO-220AB", Package="TO-220-3 Infineon", Check_prices=https://www.snapeda.com/parts/IRLB8721PBF/Infineon/view-part/?ref=eda, MF="Infineon Technologies", MP=IRLB8721PBF, SnapEDA_Link=https://www.snapeda.com/parts/IRLB8721PBF/Infineon/view-part/?ref=snap
Q3 Q4: library part MMBT3904, "MMBT3904 Series 40 V CE Breakdown 0.2 A NPN General Purpose Amplifier - SOT-23", Case/Package=SOT-23, Collector Base Voltage (VCBO)=60V, Collector Emitter Breakdown Voltage=40V, Collector Emitter Saturation Voltage=300mV, Current Rating=200mA, Emitter Base Voltage (VEBO)=6V, Manufacturer=onsemi, Max Operating Temperature=150°C, Max Power Dissipation=350mW, Min Operating Temperature=-55°C, Package Quantity=1, Supplier Part Number 1=9846727, Transition Frequency=300MHz, Category=BJTs, Collector Emitter Voltage (VCEO)=40V, Collector-emitter Voltage-Max=300mV, hFE Min=100, Lead Free="Lead Free", Manufacturer Part Number=MMBT3904, Max Breakdown Voltage=40V, Max Collector Current=200mA, MOUNT="Surface Mount", Number of Pins=3, Packaging="Tape and Reel", Polarity=NPN, Pricing 1="5=0,136, 25=0,133, 100=0,0476, 250=0,0435, 500=0,043, 1000=0,022, 5000=0,02 (GBP)", Radiation Hardening=No, Reach SVHC Compliant=No, RoHS=Yes, RoHS Compliant=Yes, Series=-, Supplier 1=Farnell, Termination=SMD/SMT, Voltage Rating (DC)=40V, Weight=0.03g
R1 R2 R3 R4 R5 R6: library part "RESCHP0427 165K 1% 0603 SMD", "RES CHP 165K 1% 1/10W 0603 SMD", CERTIFICATION=NA, CLASS=B, ComponentLink1Description=Datasheet, ComponentLink1URL=https://datasheet.lcsc.com/lcsc/2304140030_YAGEO-RT0603FRD07100RL_C160603.pdf, LINE=SMT, MOUNT=SMD, TMG CODE=None, TMG PN=RESCHP0167, TYPE=EP, UNIT=PCS
R7 R8 R9 R10 R11 R12 R13 R14 R15 R16 R17 R18 R19 R20 R21 R22 R23 R24 R25 R26 R27 R28 R29 R30 R31: library part "Resistor 2.2K", "Res Thick Film 0603 2.2K Ohm 5% 1/10W ±200ppm/°C Molded SMD SMD Paper T/R", Case Code (Imperial)=0603, Case Code (Metric)=1608, Manufacturer=Vishay, Manufacturer Part Number=CRCW06032K20JNEA, Max Operating Temperature=155°C, Max Power Dissipation=100mW, Min Operating Temperature=-55°C, Package Quantity=5000, Ratings=AEC-Q200, Resistance=2.2kR, Resistance Tolerance=5%, Resistor Type="Thick Film", Temperature Coefficient=200ppm/°C, Voltage Rating=75V, Case/Package=0603, Category="Chip SMD Resistors", ComponentLink1Description=https://datasheet.ciiva.com/2462/dcrcwe3-2462048.pdf?src-supplier=Digikey, ComponentLink1URL=https://datasheet.ciiva.com/2462/dcrcwe3-2462048.pdf?src-supplier=Digikey, ComponentLink2Description=https://datasheet.ciiva.com/16767/70201119-16767464.pdf?src-supplier=Allied+Electronics, ComponentLink2URL=https://datasheet.ciiva.com/16767/70201119-16767464.pdf?src-supplier=Allied+Electronics, ComponentLink3Description=https://datasheet.ciiva.com/2462/dcrcwe3-2462046.pdf?src-supplier=Digikey, ComponentLink3URL=https://datasheet.ciiva.com/2462/dcrcwe3-2462046.pdf?src-supplier=Digikey, ComponentLink4Description=https://datasheet.ciiva.com/5541/dcrcwe3-109170-5541959.pdf?src-supplier=Mouser, ComponentLink4URL=https://datasheet.ciiva.com/5541/dcrcwe3-109170-5541959.pdf?src-supplier=Mouser, ComponentLink5Description=https://datasheet.ciiva.com/16286/dcrcwe3-16286997.pdf?src-supplier=Future+Electronics, ComponentLink5URL=https://datasheet.ciiva.com/16286/dcrcwe3-16286997.pdf?src-supplier=Future+Electronics, Construction=Rectangular, Contact Plating=Tin, Depth=0.85mm, Features="Automotive AEC-Q200", Height=0.45mm, Lead Free=5697LeadFree, Length=1.55mm, Military Standard=Not, Number of Terminations=2, Packaging="Tape and Reel", Power Rating=100mW, Pricing 1="5000=0.0053 (USD)", Radiation Hardening=No, Reach SVHC Compliant=Unknown, RoHS=Yes, RoHS Compliant=Yes, Series=CRCW, Size Code=0603, Stock 1=130000, Supplier 1="Arrow Electronics", Supplier Part Number 1=CRCW06032K20JNEA, Termination=SMD/SMT, Tolerance=5%, Weight=7.1E-05oz, Width=0.85mm
SW1 SW2: "Switch button 4 pin"
U1: "3-V to 20-V, 25-A, 1.2-MHz synchronous buck controller with FSS", Package="VSON-10 Texas Instruments", Check_prices=https://www.snapeda.com/parts/TPS40305DRCT/Texas+Instruments/view-part/?ref=eda, MF="Texas Instruments", MP=TPS40305DRCT, SnapEDA_Link=https://www.snapeda.com/parts/TPS40305DRCT/Texas+Instruments/view-part/?ref=snap
U2: "1A LOW DROPOUT VOLTAGE REGULATOR SOT-223", Package="SOT-223 Seeed Technology", Availability="Not in stock", Check_prices=https://www.snapeda.com/parts/AMS1117/Advanced+Monolithic+Systems/view-part/?ref=eda, MF="Advanced Monolithic Systems", MP=AMS1117, Price=None, SnapEDA_Link=https://www.snapeda.com/parts/AMS1117/Advanced+Monolithic+Systems/view-part/?ref=snap
U4: "Multiprotocol Modules SMD module ESP32-WROOM-32UE, ESP32-D0WD-V3, ESP32 ECO V3,", Manufacturer="Espressif Systems", Supplier Part Number 1=1965-ESP32-WROOM-32UE-N8CT-ND, Category=LDO, ComponentLink1Description=https://datasheet.octopart.com/ESP32-WROOM-32UE-N8-Espressif-Systems-datasheet-188867343.pdf?src-supplier=TME, ComponentLink1URL=https://datasheet.octopart.com/ESP32-WROOM-32UE-N8-Espressif-Systems-datasheet-188867343.pdf?src-supplier=TME, Manufacturer Part Number=ESP32-WROOM-32UE-N8, Pricing 1="1=5,28, 10=4,566, 25=4,3196, 100=3,9802, 250=3,7768 (USD)", RoHS=No, Stock 1=3266, Supplier 1=Digikey
U5: "50-V, 3.6-A H-bridge motor driver with integrated current sensing", Package="HSOIC-8 Texas Instruments", Check_prices=https://www.snapeda.com/parts/DRV8871DDAR/Texas+Instruments/view-part/?ref=eda, MF="Texas Instruments", MP=DRV8871DDAR, SnapEDA_Link=https://www.snapeda.com/parts/DRV8871DDAR/Texas+Instruments/view-part/?ref=snap
U6 U7: "CAN 1MBd Silent 5V Automotive 8-Pin SO T/R", Package=None, Check_prices=https://www.snapeda.com/parts/TJA1050/NXP+Semiconductors/view-part/?ref=eda, MF="NXP Semiconductors", MP=TJA1050, SnapEDA_Link=https://www.snapeda.com/parts/TJA1050/NXP+Semiconductors/view-part/?ref=snap
Y1 Y2: library part C3E-8.000-8-1015-R, Package=None, Availability=Unavailable, MP=C3E-8.000-8-1015-R, Price=None

## Via types
v1: diameter 0.6, hole 0.3, Top Layer to Bottom Layer, 74 vias
v2: diameter 0.7, hole 0.35, Top Layer to Bottom Layer, 65 vias
v3: diameter 1, hole 0.5, Top Layer to Bottom Layer, 13 vias

## Nets (pads, with @x,y where several pads share a name; then routed paths per layer and width w, separated by ;. In a path a pad name is that pad's centre, name@x,y a point inside that pad or via, vN(x,y) a via of type N, cw(c..) or ccw(c..) an arc to the next point about the centre after c; other vN are vias at no path point)
3V3: C16.2 C17.2 FB3.1 U2.2 U2.4
  other v1: 66.802,44.323 66.802,46.164 66.802,48.006
+5V: C6.2 C8.2 C9.2 C14.2 C35.2 C37.2 C40.P C41.P D1.1 FB2.1 J1.1 J4.1 J5.1 L1.2 R1.2 U6.3 U7.3 | length 171.4
  Top Layer w0.2: v2(34.671,19.05) 34.671,13.335 40.005,8.001 C41.P ; D1.1 69.57,36.475 70.358,35.687
  Top Layer w0.35: v3(2.921,53.467) 2.921,36.971 J4.1 ; J1.1 7.269,78.77 v2(7.366,78.867) ; U6.3 19.774,50.292 C37.2@20.066,50.584 ; v3(19.812,46.863) 19.812,43.18 20.32,42.672 ; C37.2 v2(19.812,51.435) ; U7.3 68.057,65.278 68.491,65.712 C35.2 68.596,70.209 v3(69.627,70.209)
  Top Layer w1: v3(62.103,59.055) 62.103,53.721 63.5,52.324 63.5,42.926
  Bottom Layer w0.2: R1.2 C6.2 31.877,21.971 v2(33.401,20.447) 33.401,20.32 v2(34.671,19.05)
  Bottom Layer w0.35: v3(2.921,53.467) 10.541,53.467 12.827,55.753 12.827,75.311 9.271,78.867 v2(7.366,78.867) ; v3(19.812,46.863) v2(19.812,51.435) ; v3(62.103,59.055) 64.897,59.055 69.215,63.373 69.215,69.798 v3(69.627,70.209)
+12V: C1.1 F1.1 JDC1.1 U5.5 | length 159.2
  Top Layer w0.35: C1.1 70.358,80.896 U5.5 71.837,80.944 v3(71.882,80.899)
  Bottom Layer w1: JDC1.1 9.525,16.383 9.525,21.336 1.143,29.718 1.143,84.455 8.128,91.44 67.183,91.44 71.882,86.741 v3(71.882,80.899)
BP: C10.2 R5.1 U1.10 | length 4.9
  Bottom Layer w0.2: U1.10 28.324,13.115 30.098,11.341 R5.1 ; R5.1@30.531,11.341 C10.2
CHASIS: J1.SH1 J1.SH2 J1.SH3 J1.SH4 J1.SH5 J1.SH6 R31.2 | length 15.8
  Top Layer w1: R31.2 4.408,71.883 4.408,72.864 J1.SH4 ; J1.SH6 4.302,74.97 J1.SH4 ; J1.SH5 5.002,80.97 J1.SH1 J1.SH3 J1.SH2 J1.SH4
COMP: C12.2 C13.2 U1.4 | length 4.3
  Bottom Layer w0.2: C13.2 24.094,14.785 24.521,14.785 24.549,14.813 25.046,14.813 25.074,14.785 U1.4
  Bottom Layer w0.35: C12.2 23.533,14.224 C13.2
CS2_CAN: J6.16 U4.27 | length 37.8
  Top Layer w0.35: U4.27 46.408,79.83 47.752,78.486 47.752,71.628 47.752,64.516 50.927,61.341 50.927,59.563 51.435,59.055 J6.16
CS_CAN: J2.16 R11.1 U4.26 | length 41.9
  Top Layer w0.35: R11.1 30.772,84.074 34.036,84.074 34.798,83.312 34.798,81.534 34.364,81.1 U4.26 33.484,80.899 v2(35.941,80.899) ; J2.16 33.401,59.182 34.036,58.547 37.973,58.547 38.354,58.928 38.354,62.992 36.957,64.389 36.957,72.898 v2(35.941,73.914)
  Bottom Layer w0.35: v2(35.941,73.914) v2(35.941,80.899)
D3V3: C18.2 C19.1 C21.2 C22.2 C23.2 C24.2 C30.2 C32.2 C34.2 C36.2 D2.1 FB3.2 J2.18 J6.18 R8.1 R10.2 R11.2 R23.1 R25.2 R26.2 R27.2 R29.2 U3.16 U4.2 U6.5 U7.5 | length 162.5
  Top Layer w0.35: v3(13.335,54.864) 12.827,54.356 C34.2 12.59,53.611 U6.5 13.97,51.562 14.681,50.851 R27.2 ; R23.1 v2(15.621,60.198) ; R8.1 v2(15.621,67.437) ; v2(20.193,82.931) 20.199,82.925 U3.16 v2(21.209,82.169) ; v2(27.813,77.343) R10.2 ; J2.18 34.455,61.722 R25.2 C32.2 v2(37.084,62.357) ; v2(43.92,88.882) 43.942,88.859 D2.1 ; J6.18 R26.2@55.791,61.595 ; R26.2 C30.2 ; 71.374,58.801 71.45,58.877 C36.2 71.45,63.593 U7.5 ; C19.1 82.042,62.063 82.042,70.612 v2(81.026,71.628) 81.013,71.615 R29.2
  Top Layer w1: v3(54.356,62.738) 54.648,62.738 55.791,61.595 R26.2
  Bottom Layer w0.35: v3(13.335,54.864) 15.621,57.15 v2(15.621,60.198)
  Bottom Layer w1: v2(15.621,60.198) v2@15.621,60.251 ; 27.292,86.868 21.463,86.868 20.447,85.852 20.447,83.185 v2(20.193,82.931) 15.621,78.359 v2(15.621,67.437) v2@15.621,60.251 ; 27.686,86.995 30.861,90.17 42.631,90.17 v2(43.92,88.882) ; v2(27.813,77.343) v2(27.813,84.709) 27.813,87.122 ; v3(54.356,62.738) 37.465,62.738 v2(37.084,62.357) 32.258,62.357 30.152,60.251 v2@15.621,60.251
D_N: R19.1 U3.6 | length 18.8
  Top Layer w0.381: R19.1 11.214,78.105 12.074,78.105 12.768,77.411 12.954,77.225 12.954,71.891 13.979,70.866 15.494,70.866 16.51,71.882 16.51,75.565 16.002,76.073 14.853,76.073 U3.6
D_P: R18.1 U3.5 | length 20.9
  Top Layer w0.381: R18.1 11.252,77.47 11.811,77.47 12.319,76.962 12.319,71.628 13.716,70.231 15.757,70.231 17.145,71.619 17.145,75.828 16.265,76.708 14.98,76.708 U3.5
DIR: U4.11 U5.3 | length 16.2
  Top Layer w0.35: U4.11 58.367,78.56 62.021,82.214 U5.3
DTR: Q3.2 R20.2 U3.13 | length 5.6
  Top Layer w0.35: U3.13 22.488,78.359 23.457,77.39 R20.2
EN: U4.12 U5.2 | length 16.2
  Top Layer w0.35: U4.12 57.478,79.83 61.132,83.484 U5.2
FB: C13.1 R1.1 R2.1 R4.2 R6.1 U1.5 | length 12.2
  Bottom Layer w0.2: R6.1 21.717,16.04 C13.1 ; R2.1 22.06,19.685 R4.2@23.749,17.996 ; U1.5 24.504,15.285 C13.1 ; R1.1 24.346,18.034 R4.2 R4.2@23.749,17.996 ; C13.1 R4.2@23.749,17.996
GND: C1.2 C2.1 C3.1 C4.1 C5.1 C8.1 C9.1 C10.1 C14.1 C15.1 C16.1 C17.1 C18.1 C19.2 C20.1 C21.1 C22.1 C23.1 C24.1 C25.1 C30.1 C32.1 C34.1 C35.1 C36.1 C37.1 C38.N C39.N C40.N C41.N J1.5 J2.9 J4.3 J5.3 J6.9 JDC1.2 JDC1.3 Q2.3 R3.1 R4.1 R7.2 R14.1 R15.1 R16.1 R24.1 R28.1 R30.1 R31.1 SW1.3 SW1.4 SW2.3 SW2.4 U1.11 U1.12 U1.13 U1.14 U1.15 U2.1 U3.1 U4.1 U4.15 U4.38 U4.39_1 U4.39_2 U4.39_3 U4.39_4 U4.39_5 U4.39_6 U4.39_7 U4.39_8 U4.39_9 U4.39_10 U4.39_11 U4.39_12 U4.39_13 U4.39_14 U4.39_15 U4.39_16 U4.39_17 U4.39_18 U4.39_19 U4.39_20 U4.39_21 U5.1 U5.7 U5.9 U5.10 U5.11 U5.12 U5.13 U5.14 U5.15 U5.16 U5.17 U6.2 U7.2 | length 131.6
  Top Layer w0.2: C38.N 28.261,30.226 40.513,30.226 43.688,33.401 48.26,33.401 48.514,33.147 ; Q2.3 45.085,3.683 32.639,3.683 32.131,4.191 v2(32.131,12.192) 32.131,26.416 33.401,27.686 42.037,27.686 44.323,29.972 47.879,29.972
  Top Layer w0.35: J1.5 7.142,76.17 v3(7.239,76.073) ; SW1.3@9.474,67.793 10.643,66.624 C20.1 ; SW2.3@9.601,60.681 10.935,59.347 C25.1 ; v2(13.462,82.169) U3.1 14.732,82.302 v2(14.732,82.931) ; v2(14.478,54.737) 14.427,54.686 C34.1 v2(15.113,53.848) ; R28.1 v2(15.367,42.291) ; U6.2 C37.1@19.812,49.022 ; v2(18.923,49.022) 18.961,48.984 C37.1 ; v2(22.225,50.8) 22.276,50.851 J2.9 v2(23.749,51.562) ; R14.1 v2(35.56,88.9) ; v2(36.068,59.817) 36.106,59.779 C32.1 ; R16.1 v2(37.846,88.773) ; v2(42.799,51.435) J6.9 ; v2(44.323,50.8) 44.247,50.876 J6.9 ; v2(45.847,51.435) J6.9 ; v2(58.166,58.801) C30.1 58.966,59.779 v2(59.182,59.563) ; U7.2 67.694,66.548 v2(67.709,66.533) ; C35.1 66.891,69.126 v2(66.929,69.088) ; C36.1 v2(69.85,62.738) ; R30.1 80.995,74.041 v2(81.016,74.063)
  Top Layer w1: v3(5.969,72.771) 6.007,72.733 R31.1 v3(6.985,71.882) ; v2(31.75,65.786) 31.824,65.86 U4.38 ; v2(33.274,64.77) 33.283,64.779 U4.38 ; v2(34.798,65.786) 34.724,65.86 U4.38 ; v3(47.498,84.963) U4.15 48.717,83.37 v3(48.755,83.408) ; v1(68.453,78.486) 69.126,77.813 C1.2
  Bottom Layer w0.2: C4.1 21.531,9.203 v1(21.844,8.89) ; v1(21.59,19.05) 22.187,18.453 R4.1 ; v1(27.504,16.433) 27.47,16.467 C5.1 27.47,18.072 v1(27.559,18.161) ; v2(32.131,12.192) C10.1 32.931,11.341 v2(33.02,11.43) ; v2(55.88,2.794) R3.1
  Bottom Layer w1: v2(14.224,10.287) 15.405,10.287 C2.1 v2(15.494,9.144)
  other v1: 17.399,1.397 19.304,1.397 21.209,1.397 23.114,1.397 25.019,1.397 17.399,3.048 19.304,3.048 21.209,3.048 23.114,3.048 25.019,3.048 17.399,4.699 19.304,4.699 21.209,4.699 23.114,4.699 25.019,4.699 83.185,38.481 76.708,38.608 76.708,39.751 77.851,39.751 83.185,40.386 76.708,40.894 77.851,41.021 83.185,42.164 76.835,42.291 77.851,42.291 77.851,43.561 76.835,43.688 83.185,43.688 83.185,45.212 83.185,46.863 83.185,48.387 72.263,50.292 73.152,50.292 72.263,51.435 73.152,51.435 72.263,52.451 73.152,52.451 72.263,53.594 73.152,53.594 72.263,54.864 73.152,54.864 72.263,56.007 73.152,56.007 52.832,64.135 54.102,64.135 55.753,64.135 57.277,64.135 59.309,64.135 61.341,64.135 62.611,64.135 41.865,71.525 43.7,71.525 41.865,73.36 43.7,73.36 41.865,75.195 43.7,75.195 68.453,79.629
  other v2: 51.13,88.214
HDRV: Q1.1 U1.7
  other v1: 29.735,14.946 30.556,14.937 30.143,15.595
INT2_CAN: J6.12 U4.13 | length 32.9
  Top Layer w0.35: v2(46.736,78.359) 46.736,63.754 50.165,60.325 50.165,55.118 51.308,53.975 J6.12 ; v2(48.26,79.883) 49.477,81.1 U4.13
  Bottom Layer w0.35: v2(46.736,78.359) v2(48.26,79.883)
INT_CAN: J2.12 R10.1 U4.29 | length 39.9
  Top Layer w0.35: R10.1 37.846,77.343 39.624,75.565 39.624,66.421 40.894,65.151 40.894,57.277 37.719,54.102 J2.12
IO35: R21.2 U4.7 | length 19.5
  Top Layer w0.35: R21.2 42.418,85.941 v2(42.418,85.217) ; v2(42.418,81.661) 42.418,80.88 42.653,80.645 46.482,80.645 48.514,78.613 48.514,73.914 48.948,73.48 U4.7
  Bottom Layer w0.35: v2(42.418,81.661) v2(42.418,85.217)
LDRV: Q2.1 R3.2 U1.9 | length 4.5
  Bottom Layer w0.2: Q2.1 55.372,5.08 R3.2
  other v1: 30.116,12.885 29.704,13.542 30.524,13.533
LED1: J4.2 U4.16 | length 109.3
  Top Layer w0.35: J4.2 2.775,32.15 1.27,33.655 1.27,69.215 1.27,83.185 8.948,90.863 45.408,90.863 46.228,90.043 U4.16
LED2: J5.2 R15.2 U4.14 | length 124.6
  Top Layer w0.35: J5.2 10.465,30.988 2.54,30.988 0.508,33.02 0.508,83.693 8.509,91.694 46.355,91.694 47.625,90.424 47.625,86.995 48.006,86.614 R15.2 50.292,82.379 U4.14
MISO_CAN: J2.15 J6.15 U4.31 | length 49.8
  Top Layer w0.35: J2.15 v2(32.766,57.912) 33.147,57.531 38.227,57.531 39.116,58.42 39.116,63.754 37.846,65.024 37.846,73.787 36.883,74.75 U4.31 ; v2(51.435,57.912) 51.562,57.785 J6.15
  Bottom Layer w0.35: v2(32.766,57.912) v2(51.435,57.912)
MOSI_CAN: J2.14 J6.14 U4.37 | length 38.8
  Top Layer w0.35: v2(32.766,56.642) J2.14 29.591,56.642 28.702,57.531 28.702,66.548 29.284,67.13 U4.37 ; v2(51.435,56.642) 51.562,56.515 J6.14
  Bottom Layer w0.35: v2(32.766,56.642) v2(51.435,56.642)
NetC3_2: C3.2 C4.2 FB1.2 U1.1
NetC5_2: C5.2 U1.2 | length 5.8
  Top Layer w0.2: v1(24.384,13.462) 24.257,13.589 24.257,15.494 v1(25.019,16.256)
  Bottom Layer w0.2: v1(24.384,13.462) 24.536,13.614 24.571,13.578 24.991,13.578 25.117,13.705 25.195,13.705 25.275,13.785 U1.2 ; v1(25.019,16.256) 25.019,16.421 C5.2
NetC6_1: C6.1 R2.2 | length 2.9
  Bottom Layer w0.2: R2.2 24.219,20.32 C6.1
NetC11_2: C11.2 U1.6 | length 4.4
  Bottom Layer w0.2: U1.6 28.324,16.005 28.651,16.332 31.839,16.332 C11.2
NetC12_1: C12.1 R6.2 | length 2
  Bottom Layer w0.2: C12.1 R6.2
NetC15_2: C15.2 FB2.2 U2.3
NetC20_2: C20.2 R8.2 R9.1 SW1.1 SW1.2 U4.3 | length 70.3
  Top Layer w0.35: SW1.2@2.972,63.271 9.474,63.271 11.227,65.024 C20.2 R8.2 27.594,65.024 v2(27.634,64.984) ; v2(29.972,78.613) 29.972,79.718 R9.1 ; v3(48.766,68.362) 48.804,68.4 U4.3
  Bottom Layer w0.35: v2(29.972,78.613) 29.972,67.321 v2(27.634,64.984) 26.543,63.892 26.543,62.992 27.178,62.357 28.067,62.357 29.845,64.135 44.539,64.135 v3(48.766,68.362)
NetC25_2: C25.2 R22.1 R23.2 SW2.1 SW2.2 U4.25 | length 50.9
  Top Layer w0.35: SW2.2@3.099,56.159 9.601,56.159 11.189,57.747 C25.2 R23.2 21.755,63.881 v2(27.686,63.881) ; R22.1 v2(31.242,82.296) 33.209,82.296 U4.25
  Bottom Layer w0.35: v2(27.686,63.881) 30.861,67.056 30.861,81.915 v2(31.242,82.296)
NetC26_1: C26.1 J2.7 Y1.1 | length 12.3
  Top Layer w0.35: J2.7 22.987,54.102 23.323,53.766 26.117,53.766 27.621,52.262 27.621,48.624 Y1.1 28.521,47.724 C26.1
NetC26_2: C26.2 Y1.4 | length 1.8
  Top Layer w0.35: Y1.4 28.521,46.764 C26.2
NetC27_1: C27.1 J2.8 Y1.3 | length 13.5
  Top Layer w0.35: J2.8 22.987,52.832 23.348,53.193 25.801,53.193 27.061,51.933 27.061,47.427 26.028,46.394 Y1.3 25.594,46.751 24.143,46.751 C27.1
NetC27_2: C27.2 Y1.2 | length 2
  Top Layer w0.35: C27.2 24.163,47.691 25.548,47.691 Y1.2
NetC28_1: C28.1 J6.7 Y2.1 | length 11.8
  Top Layer w0.35: J6.7 44.975,53.975 45.308,53.642 47.693,53.642 49.596,51.738 49.596,49.088 50.452,48.232 C28.1
NetC28_2: C28.2 Y2.4 | length 2.1
  Top Layer w0.35: Y2.4 50.525,47.272 C28.2
NetC29_1: C29.1 J6.8 Y2.3 | length 12.8
  Top Layer w0.35: J6.8 44.955,52.705 45.275,53.024 47.433,53.024 49.022,51.435 49.022,47.872 48.015,46.865 Y2.3 47.512,47.272 C29.1
NetC29_2: C29.2 Y2.2 | length 2.1
  Top Layer w0.35: C29.2 47.585,48.232 Y2.2
NetD1_2: D1.2 R7.1 | length 1.9
  Top Layer w0.2: D1.2 R7.1
NetD2_2: D2.2 R21.1 | length 2.7
  Top Layer w0.35: R21.1 43.448,86.511 D2.2
NetJ1_2: J1.2 R19.2 | length 3.2
  Top Layer w0.2: J1.2 8.105,78.12 R19.2
NetJ1_3: J1.3 R18.2 | length 3.2
  Top Layer w0.2: J1.3 8.128,77.47 R18.2
NetJ2_1: J2.1 U6.4 | length 12.6
  Top Layer w0.35: U6.4 18.288,51.562 20.025,53.299 20.025,60.189 21.557,61.722 J2.1
NetJ2_2: J2.2 U6.1 | length 16.4
  Top Layer w0.35: U6.1 20.288,47.752 20.701,48.165 20.701,59.67 21.483,60.452 J2.2
NetJ2_17: J2.17 R25.1 | length 3.8
  Top Layer w0.35: J2.17 34.125,60.452 R25.1
NetJ3_1: J3.1 U5.6 | length 7.8
  Top Layer w0.35: U5.6 70.784,82.214 71.374,82.804 77.089,82.804 J3.1
NetJ3_2: J3.2 U5.8 | length 7.7
  Top Layer w0.35: U5.8 70.948,84.754 71.501,84.201 76.835,84.201 77.303,84.669 J3.2
NetJ6_1: J6.1 U7.4 | length 23.8
  Top Layer w0.35: J6.1 v2(45.847,61.595) ; v2(66.421,62.992) 66.421,63.864 U7.4
  Bottom Layer w0.35: v2(45.847,61.595) 65.024,61.595 v2(66.421,62.992)
NetJ6_2: J6.2 U7.1 | length 31.3
  Top Layer w0.35: J6.2 v2(45.974,60.325) ; U7.1 67.726,67.818 v2(67.763,67.855)
  Bottom Layer w0.35: v2(45.974,60.325) 65.151,60.325 68.453,63.627 68.453,67.183 67.781,67.855 v2(67.763,67.855)
NetJ6_17: J6.17 R26.1 | length 2.9
  Top Layer w0.35: J6.17 55.449,60.325 55.995,59.779 R26.1
NetJ7_1: J7.1 U6.6 | length 8.2
  Top Layer w0.35: J7.1 6.728,48.514 9.143,48.514 10.49,49.862 12.16,49.862 U6.6
NetJ7_2: J7.2 U6.7 | length 8
  Top Layer w0.35: J7.2 5.862,47.137 6.604,47.879 9.262,47.879 10.699,49.316 12.296,49.316 U6.7
NetJ8_1: J8.1 U7.6 | length 7.7
  Top Layer w0.35: U7.6@72.263,65.405 72.517,65.659 78.489,65.659 J8.1
NetJ8_2: J8.2 U7.7 | length 8.2
  Top Layer w0.35: U7.7 72.18,66.548 72.561,66.167 78.489,66.167 J8.2
NetQ3_1: Q3.1 R12.1 | length 6.6
  Top Layer w0.35: Q3.1 23.184,80.207 v2(23.241,80.264) ; v2(25.146,83.82) R12.1
  Bottom Layer w0.35: v2(23.241,80.264) 23.241,81.915 v2(25.146,83.82)
NetQ3_3: Q3.3 R9.2 | length 3.5
  Top Layer w0.35: Q3.3 25.781,78.613 27.051,79.883 R9.2
NetQ4_1: Q4.1 R20.1 | length 8.7
  Top Layer w0.35: Q4.1 24.384,82.173 24.384,76.111 R20.1
NetQ4_3: Q4.3 R22.2 | length 3
  Top Layer w0.35: Q4.3 28.41,82.423 R22.2
NetR5_2: R5.2 U1.3 | length 8.3
  Top Layer w0.2: v1(24.798,14.213) 26.691,12.319 28.448,10.562 v2(28.448,10.033)
  Bottom Layer w0.2: v1(24.798,14.213) 24.798,14.2 24.819,14.178 24.846,14.178 24.953,14.285 U1.3
  Bottom Layer w0.35: v2(28.448,10.033) 28.74,9.741 R5.2
NetR13_1: R13.1 U4.35 | length 3.6
  Top Layer w0.35: R13.1 30.772,69.723 33.23,69.723 U4.35
NetR14_2: R14.2 U4.24 | length 3.2
  Top Layer w0.35: R14.2 36.068,85.852 U4.24
NetR16_2: R16.2 U4.23 | length 3.2
  Top Layer w0.35: U4.23 37.338,85.852 R16.2
NetR17_1: R17.1 U4.34 | length 3.6
  Top Layer w0.35: R17.1 30.099,71.628 30.861,70.866 33.209,70.866 U4.34
nFAULT: R24.2 U4.6 U5.4 | length 22.1
  Top Layer w0.35: U4.6 51.636,72.21 52.578,73.152 52.578,75.565 53.848,76.835 59.182,76.835 63.291,80.944 U5.4 65.024,80.926 R24.2
RTS: Q4.2 R12.2 U3.14 | length 8.7
  Top Layer w0.35: U3.14 21.34,79.629 Q4.2 23.048,81.473 22.098,82.423 22.098,83.896 R12.2
RX: R17.2 U3.2 | length 22.4
  Top Layer w0.35: U3.2 17.399,80.899 18.796,79.502 18.796,72.136 19.812,71.12 27.028,71.12 27.536,71.628 R17.2
SCK_CAN: J2.13 J6.13 U4.30 | length 53.5
  Top Layer w0.35: J2.13 v2(32.766,55.372) 37.211,55.372 39.878,58.039 39.878,64.643 38.862,65.659 38.862,74.803 37.645,76.02 U4.30 ; v2(51.435,55.372) 51.562,55.245 J6.13